# Altium PCB encoder.PcbDoc
Units mil, origin at the board's own origin, x right, y up, seen from the top; angles counter-clockwise.
Board outline 2761.95 x 2761.84 mil, 2 copper layers (Top Layer, Bottom Layer); 87 components, 82 nets, 319 pads, 169 vias.
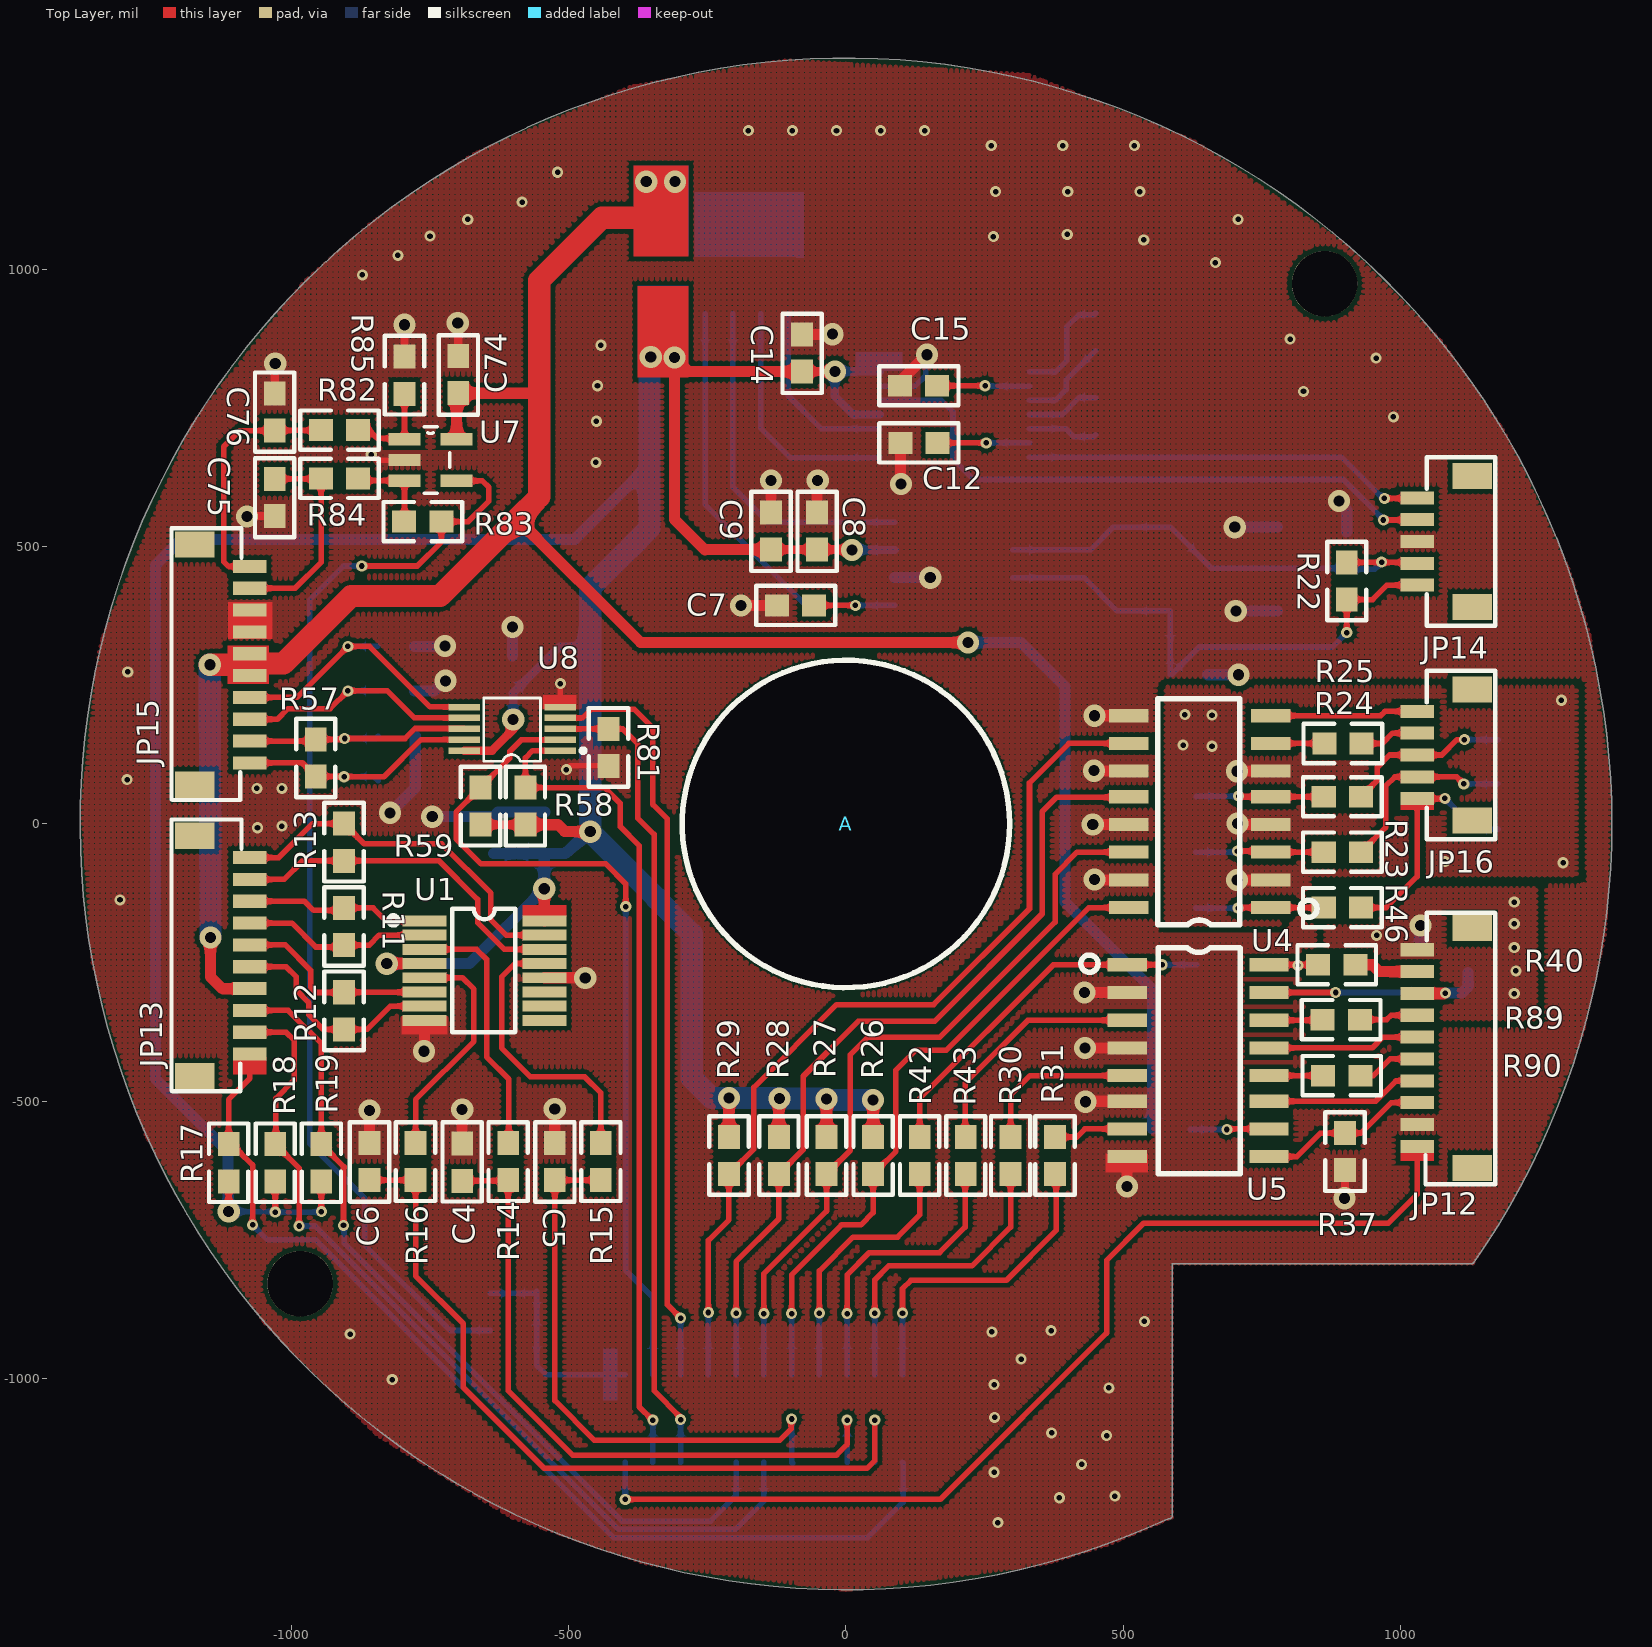
[diagram p0: Top Layer view]
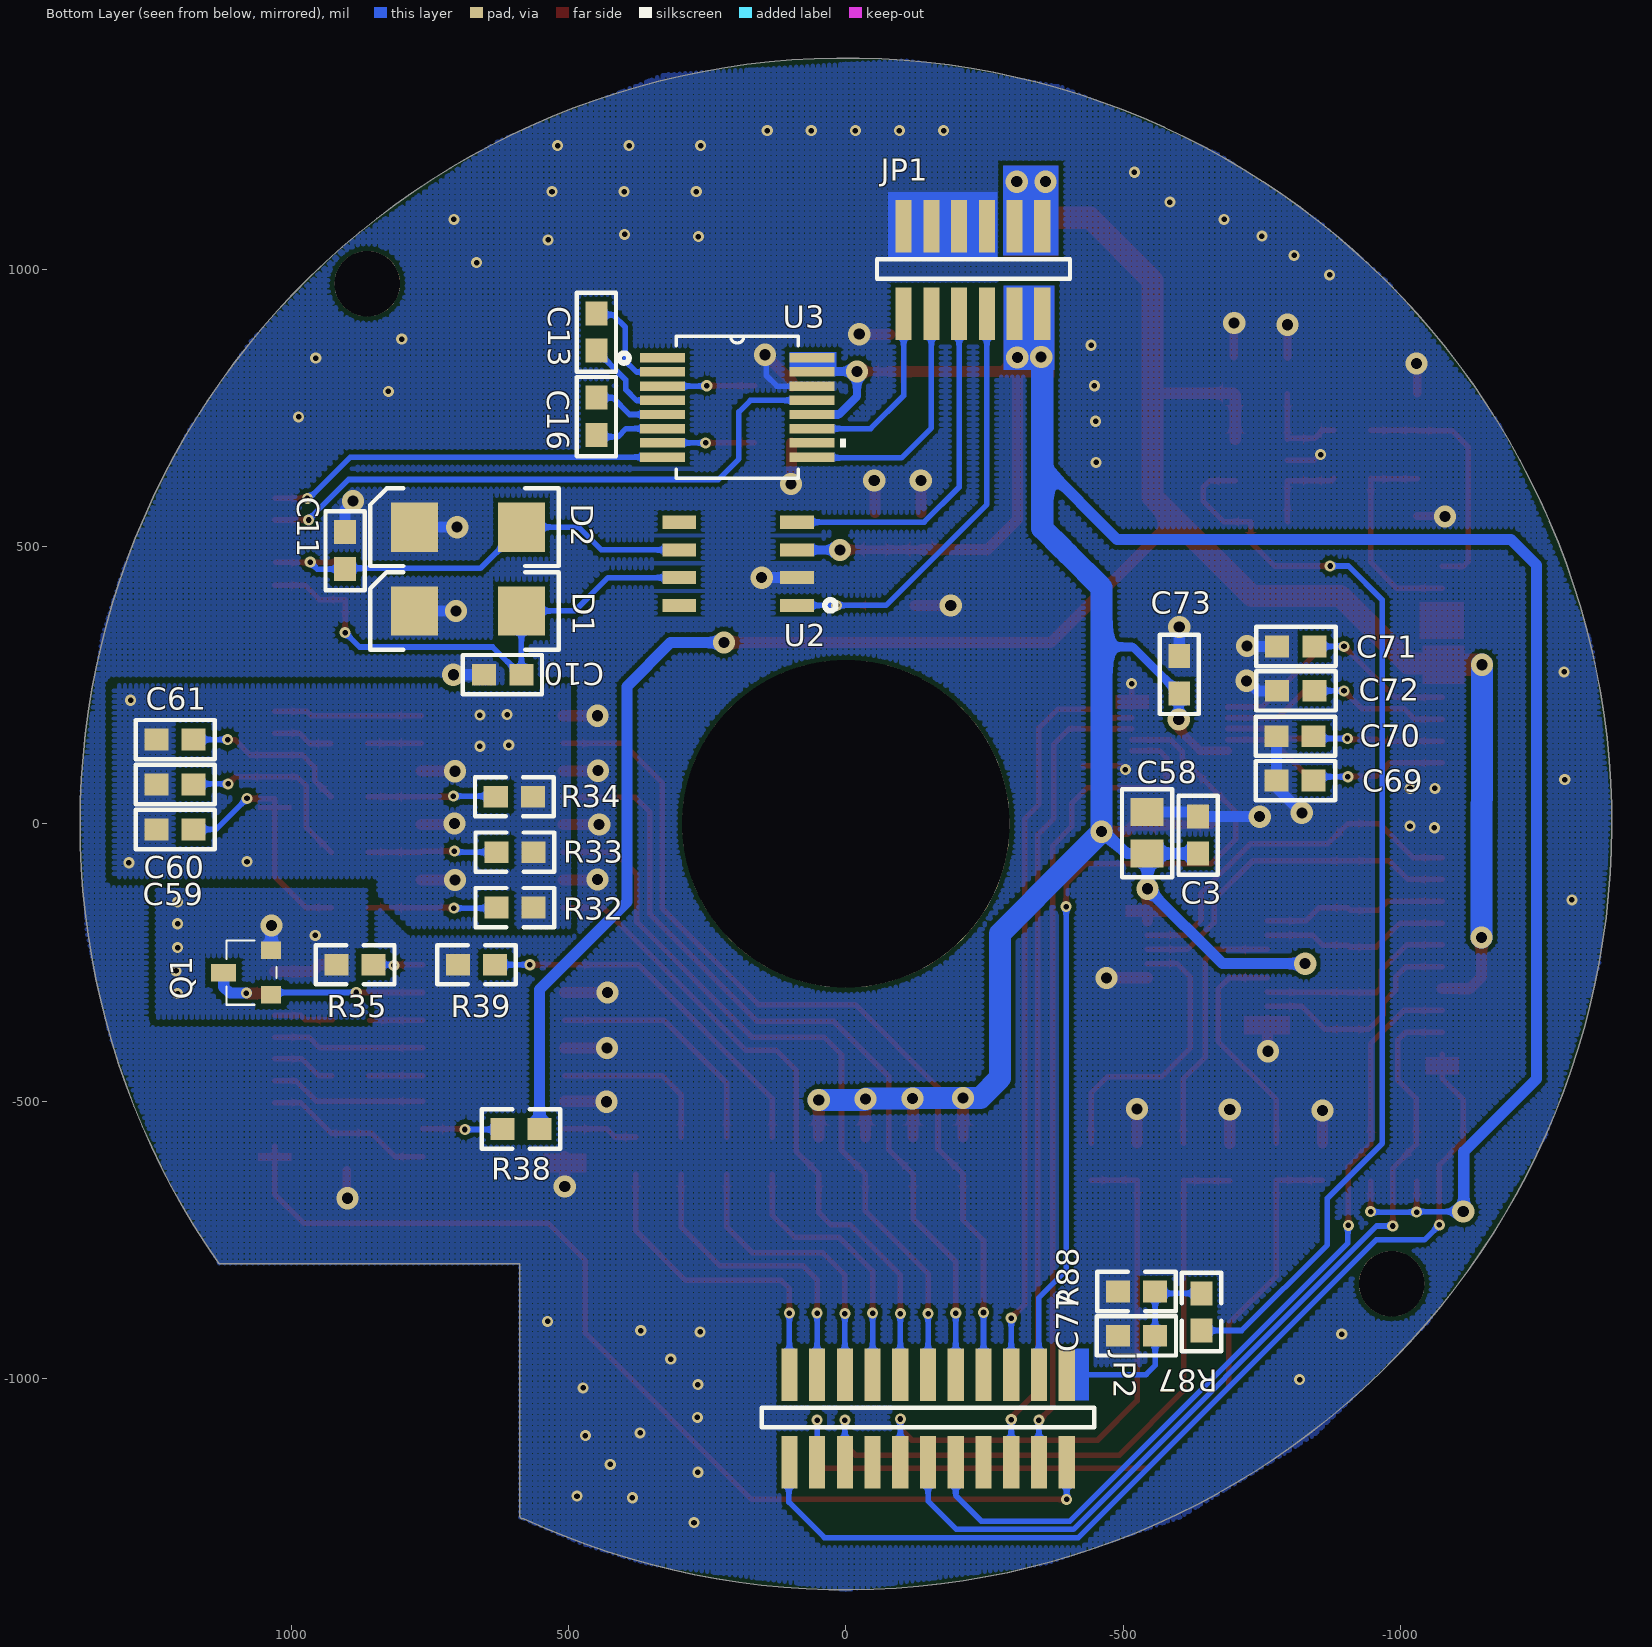
[diagram p1: Bottom Layer view, seen from below]

## Layer stack, top to bottom
Top Solder: solder mask 0.4, Solder Resist, Dk 3.5
Top Layer: signal copper 1.4
Dielectric 1: dielectric 12.6, FR-4, Dk 4.8
Bottom Layer: signal copper 1.4
Bottom Solder: solder mask 0.4, Solder Resist, Dk 3.5

## Board outline
581.26,-1252.7 cw(c0,0) 1380.99,0 cw(c0,0) 1132.1,-790.86 cw(c1127.99,-787.99) 1127.99,-793.01 588.01,-793.01 588.01,-1247.99 cw(c582.99,-1247.99)

## Design rules (kind name [scope] priority, off if disabled: settings)
Clearance Clearance_3 [InNet('GND1')] p1: gap=10
Clearance Clearance_2 [InNet('GND2')] p2: gap=10
Clearance Clearance_1 [InNet('GND')] p3: gap=8
Clearance [All] p4: gap=5
ComponentClearance [All] p1: gap=0 collisioncheckmode=3 verticalgap=0 showdistances=FALSE
HoleSize [All] p1: absolutevalues=TRUE maxlimit=600 minlimit=1 maxpercent=80.000 minpercent=20.000
HoleToHoleClearance [All] p1: gap=0 allowstackedmicrovias=TRUE
MinimumSolderMaskSliver [All] p1: minsoldermaskwidth=0
PolygonConnect [All] p1: connectstyle=Direct reliefconductorwidth=10 reliefentries=4 polygonreliefangle="90 Angle" airgapwidth=10
RoutingVias [All] p1: holewidth=10 width=20 viastyle="Through Hole" minholewidth=10 minwidth=20 maxholewidth=28 maxwidth=50
SilkToSilkClearance [All] p1: silktosilkclearance=0
SilkToSolderMaskClearance [IsPad] p1: minsilkscreentomaskgap=0 clearancetoexposedcopper=TRUE
SolderMaskExpansion [All] p1: expansion=4
UnpouredPolygon [All] p1: allowunpoured=FALSE
Width [All] p1: maxlimit=40 minlimit=8 preferedwidth=10
23 further rules are at their usual default settings.

## Components (designator, comment, footprint, x,y, rotation, side; value= is the part's Value field where it differs from the comment)
A "circle" Circle 0,0 r90 top locked
C3 "0603B103J6R3NT" CC1608-0603 -635,-19.87 r270 bottom
C4 "0603B150J6R3NT" CC1608-0603 -692,-610 r90 top
C5 "0603B150J6R3NT" CC1608-0603 -525,-609 r270 top
C6 "0603B150J6R3NT" CC1608-0603 -859,-609 r270 top
C7 "0603B104J6R3NT" CC1608-0603 -91,394 r0 top
C8 "0603B104J6R3NT" CC1608-0603 -52,528 r270 top
C9 "0603B104J6R3NT" CC1608-0603 -135,528 r270 top
C10 "0603B104J6R3NT" CC1608-0603 618.87,269 r0 bottom
C11 "0603B104J6R3NT" CC1608-0603 903,493 r270 bottom
C12 "0603B104J6R3NT" CC1608-0603 132,687 r180 top
C13 "0603B104J6R3NT" CC1608-0603 450,887 r270 bottom
C14 "0603B104J6R3NT" CC1608-0603 -79,849 r270 top
C15 "0603B104J6R3NT" CC1608-0603 131,790 r0 top
C16 "0603B104J6R3NT" CC1608-0603 450,735 r270 bottom
C58 "0805B106J100NT" CC2012-0805 -543,-16 r270 bottom
C59 "0603B104J6R3NT" CC1608-0603 1210,-10 r180 bottom
C60 "0603B104J6R3NT" CC1608-0603 1210,71 r180 bottom
C61 "0603B104J6R3NT" CC1608-0603 1210,152 r180 bottom
C69 "0603B331J6R3NT" CC1608-0603 -810,78 r180 bottom
C70 "0603B331J6R3NT" CC1608-0603 -810,158 r180 bottom
C71 "0603B331J6R3NT" CC1608-0603 -811,320 r180 bottom
C72 "0603B331J6R3NT" CC1608-0603 -811,240 r180 bottom
C73 "0603B104J6R3NT" CC1608-0603 -601,269 r90 bottom
C74 "0603B331J6R3NT" CC1608-0603 -699,810 r270 top
C75 "0603B331J6R3NT" CC1608-0603 -1030,588.66 r270 top
C76 "0603B331J6R3NT" CC1608-0603 -1030,743 r270 top
C77 "0603B331J6R3NT" CC1608-0603 -524.13,-923 r0 bottom
D1 "Diode Schottky" TVS 778,384 r180 bottom
D2 "Diode Schottky" TVS 778,535 r180 bottom
JP1 "Header 6X2" DC_1.27_12 -354.02,1077.99 r180 bottom locked
JP2 "Header 11X2" DC_1.27_22 -397.99,-992.99 r180 bottom locked
JP12 "Header 10" SH1.0T-10A 1030,-227 r270 top
JP13 "Header 10" SH1.0T-10A -1075,-415 r90 top
JP14 "SH1.0T-5A" SH1.0T-5A 1030,588 r270 top
JP15 "Header 10" SH1.0T-10A -1075,110 r90 top
JP16 "SH1.0T-5A" SH1.0T-5A 1030,203 r270 top
Q1 "NPN" SOT-23 1037,-308 r90 bottom
R11 "RC03K101JT" CR1608-0603 -905,-185 r270 top
R12 "RC03K101JT" CR1608-0603 -905,-337 r90 top
R13 "RC03K101JT" CR1608-0603 -905,-33 r90 top
R14 "RC03K100JT" CR1608-0603 -609,-609 r90 top
R15 "RC03K100JT" CR1608-0603 -442,-609 r90 top
R16 "RC03K100JT" CR1608-0603 -776,-609 r90 top
R17 "RC03K492JT" CR1608-0603 -1113,-611 r90 top
R18 "RC03K492JT" CR1608-0603 -1029,-611 r90 top
R19 "RC03K492JT" CR1608-0603 -946,-611 r90 top
R22 "RC03K121JT" CR1608-0603 903,438 r270 top
R23 "RC03K492JT" CR1608-0603 895,-51 r0 top
R24 "RC03K492JT" CR1608-0603 895,49 r0 top
R25 "RC03K492JT" CR1608-0603 896,145 r0 top
R26 "RC03K492JT" CR1608-0603 49,-598 r90 top
R27 "RC03K492JT" CR1608-0603 -35,-598 r90 top
R28 "RC03K492JT" CR1608-0603 -121,-598 r90 top
R29 "RC03K492JT" CR1608-0603 -211,-598 r90 top
R30 "RC03K492JT" CR1608-0603 297,-598 r270 top
R31 "RC03K492JT" CR1608-0603 377,-598 r270 top
R32 "RC03K501JT" CR1608-0603 597,-151 r180 bottom
R33 "RC03K501JT" CR1608-0603 597,-51 r180 bottom
R34 "RC03K501JT" CR1608-0603 598,49 r180 bottom
R35 "RC03K492JT" CR1608-0603 885,-254 r180 bottom
R37 "RC03K492JT" CR1608-0603 899.87,-591 r90 top
R38 "RC03K492JT" CR1608-0603 586,-550 r0 bottom
R39 "RC03K492JT" CR1608-0603 666,-254 r180 bottom
R40 "RC03K492JT" CR1608-0603 885,-254 r0 top
R42 "RC03K492JT" CR1608-0603 133,-598 r270 top
R43 "RC03K492JT" CR1608-0603 216,-598 r270 top
R46 "RC03K492JT" CR1608-0603 895,-151 r0 top
R57 "RC03K121JT" CR1608-0603 -956,119 r270 top
R58 "RC03K103JT" CR1608-0603 -578,32 r90 top
R59 "RC03K103JT" CR1608-0603 -659,32 r90 top
R81 "RC03K103JT" CR1608-0603 -428,138 r270 top
R82 "RC03K103JT" CR1608-0603 -913,710 r0 top
R83 "RC03K103JT" CR1608-0603 -763,545 r0 top
R84 "RC03K103JT" CR1608-0603 -913,623 r0 top
R85 "RC03K103JT" CR1608-0603 -796,809 r270 top
R87 "RC03K103JT" CR1608-0603 -641,-880 r270 bottom
R88 "RC03K103JT" CR1608-0603 -524,-843 r0 bottom
R89 "RC03K492JT" CR1608-0603 893,-353 r180 top
R90 "RC03K492JT" CR1608-0603 894,-454 r180 top
U1 "DS90LV032A" DS90LV032A -760,-175 r0 top
U2 "TCAN322" TCAN332 88,394 r0 bottom
U3 "MAX3227E_DB_16" MAX3227E 196,751 r180 bottom
U4 "PS2805C-4" PS2805C_4 766,-151 r180 top
U5 "PS2805C-4" PS2805C_4 507,-254 r0 top
U7 "LVM321" LVM321 -749,656 r0 top
U8 "SN65HVD73" SN65HVD73 -515,132 r90 top

## Footprints (in the part's own frame and the unit in brackets; to place one, negate y for a bottom-side part, rotate by r counter-clockwise, add the part's x,y. Pads: shape width x height; smd on the part's side, far side on the other; paste and mask are expansions set on the pad)
CC1608-0603 [mm]
  rect 1.1x1 smd: 1(-0.85,0) 2(0.85,0)
  silkscreen extent -1.8,-0.9 1.83,0.9
CC2012-0805 [mm]
  rect 1.3x1.5 smd: 1(-0.95,0) 2(0.95,0)
  silkscreen extent -2,-1.15 2.03,1.15
Circle [mm]
  round 15 hole 15: 0(0,0)
  silkscreen extent -7.5,-7.5 7.5,7.5
CR1608-0603 [mm]
  rect 1.1x1 smd: 1(-0.85,0) 2(0.85,0)
  silkscreen extent -1.8,-0.9 1.8,0.9
DC_1.27_12 [mm]
  rect 0.74x2.4 smd: 1(0,0) 2(0,-4.013) 3(-1.27,0) 4(-1.27,-4.013) 5(-2.54,0) 6(-2.54,-4.013) 7(-3.81,0) 8(-3.81,-4.013) 9(-5.08,0) 10(-5.08,-4.013) 11(-6.35,0) 12(-6.35,-4.013)
  silkscreen extent -7.57,-2.41 1.27,-1.52
DC_1.27_22 [mm]
  rect 0.74x2.4 smd: 1(0,0) 2(0,-4.013) 3(-1.27,0) 4(-1.27,-4.013) 5(-2.54,0) 6(-2.54,-4.013) 7(-3.81,0) 8(-3.81,-4.013) 9(-5.08,0) 10(-5.08,-4.013) 11(-6.35,0) 12(-6.35,-4.013) 13(-7.62,0) 14(-7.62,-4.013) 15(-8.89,0) 16(-8.89,-4.013) 17(-10.16,0) 18(-10.16,-4.013) 19(-11.43,0) 20(-11.43,-4.013) 21(-12.7,0) 22(-12.7,-4.013)
  silkscreen extent -13.97,-2.41 1.27,-1.52
DS90LV032A [mm]
  rect 2x0.5 smd: 1(0,0) 2(0,-0.65) 3(0,-1.3) 4(0,-1.95) 5(0,-2.6) 6(0,-3.25) 7(0,-3.9) 8(0,-4.55) 9(5.5,-4.55) 10(5.5,-3.9) 11(5.5,-3.25) 12(5.5,-2.6) 13(5.5,-1.95) 14(5.5,-1.3) 15(5.5,-0.65) 16(5.5,0)
  silkscreen extent -1.63,-5.11 4.17,0.56
LVM321 [mil]
  rect 58x22 smd: 1(-47,37.4) 2(-47,0) 3(-47,-37.4) 4(47,-37.4) 5(47,37.4)
  silkscreen extent -12,-60 34,60
MAX3227E [mil]
  rect 81x17 smd: 1(-135,89.57) 2(-135,63.98) 3(-135,38.39) 4(-135,12.8) 5(-135,-12.8) 6(-135,-38.39) 7(-135,-63.98) 8(-135,-89.57) 9(135,-89.57) 10(135,-63.98) 11(135,-38.39) 12(135,-12.8) 13(135,12.8) 14(135,38.39) 15(135,63.98) 16(135,89.57)
  silkscreen extent -213,-128 196,128
PS2805C_4 [mm]
  rect 1.8x0.6 smd: 1(0,0) 2(0,-1.27) 3(0,-2.54) 4(0,-3.81) 5(0,-5.08) 6(0,-6.25) 7(0,-7.52) 8(0,-8.79) 9(6.5,-8.79) 10(6.5,-7.52) 11(6.5,-6.25) 12(6.5,-5.08) 13(6.5,-3.81) 14(6.5,-2.54) 15(6.5,-1.27) 16(6.5,0)
  silkscreen extent -2.12,-9.58 5.18,0.79
SH1.0T-5A [mm]
  rect 1.2x1.8 smd: 0(-1,2.525) 0(5,2.525)
  rect 0.6x1.55 smd: 1(0,0) 2(1,0) 3(2,0) 4(3,0) 5(4,0)
  silkscreen extent -1.85,0.43 5.87,3.58
SH1.0T-10A [mm]
  rect 1.2x1.8 smd: 0(-1,2.525) 0(10,2.525)
  rect 0.6x1.55 smd: 1(0,0) 2(1,0) 3(2,0) 4(3,0) 5(4,0) 6(5,0) 7(6,0) 8(7,0) 9(8,0) 10(9,0)
  silkscreen extent -1.7,0.38 10.74,3.58
SN65HVD73 [mm]
  rect 0.3x1.45 smd: 1(0,0) 2(0.5,0) 3(1,0) 4(1.5,0) 5(2,0) 6(2,4.4) 7(1.5,4.4) 8(1,4.4) 9(0.5,4.4) 10(0,4.4)
  silkscreen extent -0.48,-1.12 2.41,3.51
SOT-23 [mil]
  rect 31.5x36 smd: 1(0,0) 2(80,0)
  rect 31.5x45 smd: 3(40,85)
  silkscreen extent -18,-10 98,80
TCAN332 [mm]
  rect 1.55x0.6 smd: 1(0,0) 2(0,-1.27) 3(0,-2.54) 4(0,-3.81) 5(5.4,-3.81) 6(5.4,-2.54) 7(5.4,-1.27) 8(5.4,0)
  silkscreen extent -1.78,-0.25 -1.27,0.25
TVS [mm]
  rect 2.16x2.26 smd: 1(0,0) 2(4.9,0)
  silkscreen extent -2.03,-1.78 6.6,1.78

## Part data
C3 C4 C5 C6 C7 C8 C9 C10 C11 C12 C13 C14 C15 C16 C58 C59 C60 C61 C69 C70 C71 C72 C73 C74 C75 C76 C77: library part CAP
D1 D2: "Schottky Diode"
JP1: "Header, 6-Pin, Dual row"
JP2: "Header, 10-Pin, Dual row"
JP12 JP13 JP15: "Header, 10-Pin"
Q1: "NPN Bipolar Transistor"
R11 R12 R13 R14 R15 R16 R17 R18 R19 R22 R23 R24 R25 R26 R27 R28 R29 R30 R31 R32 R33 R34 R35 R37 R38 R39 R40 R42 R43 R46 R57 R58 R59 R81 R82 R83 R84 R85 R87 R88 R89 R90: library part Resistor
U3: "Imported"
U4 U5: "Optoisolator"

## Free pads (board coordinates)
  round 118.11 hole 118.11: 9(-984.02,-829.02) 9(862.99,974.02)

## Via types
v1: diameter 20, hole 10, Top Layer to Bottom Layer, 113 vias
v2: diameter 40, hole 20, Top Layer to Bottom Layer, 56 vias

## Nets (pads, with @x,y where several pads share a name; then routed paths per layer and width w, separated by ;. In a path a pad name is that pad's centre, name@x,y a point inside that pad or via, vN(x,y) a via of type N, cw(c..) or ccw(c..) an arc to the next point about the centre after c; other vN are vias at no path point)
3V3: C3.2 C8.2 C9.2 C14.2 C58.2 C73.1 JP1.2 JP1.4 R17.1 R18.1 R19.1 R26.2 R27.2 R28.2 R29.2 R58.1 R59.1 U1.4 U1.16 U2.3 U3.12 U3.15 U3.16 U8.10 | length 7157.9
  Top Layer w10: v2(-1113,-699) R17.1 ; v1(-1029,-700) R18.1 ; v1(-946,-699) R19.1 ; v2(11,494) 22.93,494 v2@23.46,494.54
  Top Layer w15: U8.10 -638,132 -600,170 v2(-600,188) ; R59.1 R58.1 ; C9.2 C8.2 v2@23.46,494.54 ; C14.2 -20.46,815.54 v2(-20,816)
  Top Layer w20: v2(-828,-252) -827.77,-251.77 U1.4 ; R58.1 -519.54,-1.46 -507,-14 v2(-461,-14) ; v2(-544,-117) -544,-174.46 U1.16 ; R29.2 v2(-211,-494) ; C9.2 -253.46,494.54 -254,494 -309,549 v2(-309,841) -283.54,815.54 C14.2 ; R28.2 -121,-496 v2(-120,-495) ; R27.2 v2(-35,-496) ; R26.2 v2(49,-498)
  Bottom Layer w10: v2@-1106.5,-705.5 -1100,-699 -1030,-699 v1(-1029,-700) -947,-700 v1(-946,-699) ; C73.1 C73.1@-600,234.54 ; v2(11,494) 23,494 24,495 v2@25,494
  Bottom Layer w15: C73.1 -517.54,319 -461,319 ; v2(-600,188) C73.1@-600,234.54 ; -400.03,487 -392.03,495 ; v2@25,494 U2.3 ; U3.12 12.8,738.2 -20,771 v2(-20,816) 59.98,816 U3.15
  Bottom Layer w20: v2(-1113,-699) -1114,-698 -1114,-591 -1245,-460 -1245,467 -1199,513 -489.02,513 -354.02,648 ; v2(-828,-252) -679,-252 v2(-544,-117) -544,-54.4 C58.2 ; C3.2 -543.07,-53.33 C58.2 ; v2(-461,-14) -506.4,-53.4 C58.2
  Bottom Layer w40: -400.03,487 -461,426.03 -461,319 v2(-461,-14) -341,-134 -341,-135 -278,-198 -278,-458 -242,-494 v2(-211,-494) -121,-494 v2(-120,-495) -36,-495 v2(-35,-496) -33,-498 v2(49,-498) ; -392.03,495 -354.02,533.02 -354.02,648 JP1.2
  other v2: -352,842
5V0: C74.2 JP1.1 JP1.3 JP13.4 JP15.5 JP15.6 R38.1 U7.5 | length 4225.8
  Top Layer w20: v2(-1146,-205) -1146,-276 -1125.11,-296.89 JP13.4 ; U7.5 -702,773.54 C74.2 -554.46,776.54 -553,778 ; -593,550 -370,327 v2(220,327) ; -555,616 -553,618
  Top Layer w40: v2(-1147,287) -1080.52,287 ; -1073,289 -1014,289 -892,411 -732,411 -593,550 -553,590 -553,618 -553,778 -553,980 -440,1093 -328,1093
  Bottom Layer w20: v2(220,327) 316,327 395,248 395,-141 552.54,-298.54 R38.1
  Bottom Layer w40: v2(-1147,287) v2(-1146,-205)
  other v2: -360,1158 -308,1158
24V: JP12.2 R40.2 | length 116.7
  Top Layer w20: R40.2 949,-254 961.37,-266.37 JP12.2
232_RXD: JP14.1 U3.8 | length 728.8
  Top Layer w10: v1(971,587) JP14.1@1029,587
  Bottom Layer w10: U3.8 893.57,661.43 968,587 v1(971,587)
232_TXD: JP14.2 U3.13 | length 1108.2
  Top Layer w10: v1(969,548) 1029.37,548 JP14.2
  Bottom Layer w10: U3.13 172.2,763.8 193,743 193,658 230,621 896.67,621 v1@969,548.67
/RE: JP2.3 R59.2 U8.2 | length 1542.6
  Top Layer w10: U8.2 -585.32,151.68 -606,131 -606,118.46 R59.2 -703,21.46 -703,-27 -658,-72 -433,-72 -397,-108 v1(-397,-149)
  Bottom Layer w10: v1(-397,-149) -397,-805 -347.99,-854.01 JP2.3
BISSC_CLK: JP2.5 U8.4 | length 1380.4
  Top Layer w10: U8.4 -474.94,191.06 -459,207 -382,207 -348,173 -348,35 -322,9 -322,-867 v1(-298,-891)
  Bottom Layer w10: JP2.5 -297.99,-888.01 v1(-298,-891)
BISSC_DIN: JP2.4 R58.2 U8.1 | length 1517.7
  Top Layer w10: U8.1 -565,132 -578,119 R58.2 -435.46,65.46 -407,37 -407,-5 -373,-39 -373,-1051 -349,-1075 v1(-348,-1075)
  Bottom Layer w10: JP2.4 v1(-348,-1075)
C+: C71.2 JP15.4 U8.6 | length 523.6
  Top Layer w10: JP15.4 -989.89,228.11 v1(-898,320) -859,320 -750,211 -688.49,211 U8.6
  Bottom Layer w10: v1(-898,320) C71.2
C-: C72.2 JP15.3 U8.7 | length 481.9
  Top Layer w10: JP15.3 -1025.26,188.74 -1006,208 -930,208 v1(-898,240) -827,240 -778,191 -688.28,191 U8.7
  Bottom Layer w10: v1(-898,240) C72.2
CAN_RX: C11.2 D2.2 JP14.4 R22.1 U2.6 | length 844.2
  Top Layer w10: R22.1 JP14.4@1028.43,471.46
  Bottom Layer w10: U2.6 441,494 482,535 D2.2 659.09,461 901.54,461 C11.2 953.54,459.54 v1(966,472)
CAN_TX: C10.1 D1.2 JP14.5 R22.2 U2.7 | length 970.8
  Top Layer w10: v1(903,345) R22.2 949.54,404.54 975.52,430.52 JP14.5
  Bottom Layer w10: U2.7 429,444 489,384 D1.2 585.09,269.32 C10.1 587,269 637,319 877,319 v1(903,345)
CANRX_MCU: JP1.8 U2.4 | length 631.1
  Bottom Layer w10: JP1.8 -204,607 -141,544 U2.4
CANTX_MCU: C7.2 JP1.6 U2.1 | length 835.9
  Top Layer w10: C7.2 v1(17,394)
  Bottom Layer w10: JP1.6 -254.02,576.02 -72,394 v1(17,394) U2.1
CAP1: JP2.12 JP13.2 R18.2 | length 1608.6
  Top Layer w10: JP13.2 -1009.37,-375.63 -995,-390 -995,-462 -1028,-495 -1028,-576.54 R18.2 -986,-620.54 v1(-986,-725)
  Bottom Layer w10: v1(-986,-725) -957,-725 -410,-1272 -199,-1272 -147.99,-1220.99 JP2.12
CAP2: JP2.22 JP13.1 R17.2 | length 1851.8
  Top Layer w10: JP13.1 -1075,-459 -1113,-497 R17.2 -1107.46,-577.54 -1070,-615 -1070,-722 -1071,-723 v1(-1070,-723)
  Bottom Layer w10: v1(-1070,-723) -1043,-750 -956,-750 -419,-1287 39,-1287 103,-1223 103,-1151.98 JP2.22
CAP3: JP2.10 JP13.3 R19.2 | length 1525.6
  Top Layer w10: JP13.3 -1005.74,-336.26 -946,-396 R19.2 -905,-618.54 -905,-620 -906,-621 v1(-906,-724)
  Bottom Layer w10: v1(-906,-724) -905,-724 -905,-755.79 -403.79,-1257 -244,-1257 -197.99,-1210.99 JP2.10
D+: C69.2 JP15.1 R57.2 U8.9 | length 489.4
  Top Layer w10: JP15.1 -980.46,110 R57.2 -908.54,85.54 -908,85 v1(-905,85) -833,85 -766,152 -688.54,152 U8.9
  Bottom Layer w10: v1(-905,85) -850.46,85 C69.2
D-: C70.2 JP15.2 R57.1 U8.8 | length 459.2
  Top Layer w10: JP15.2 -959.09,149.37 R57.1 -904.54,152.46 -904,153 v1(-904,154) -795,154 -777,172 -688.86,172 U8.8
  Bottom Layer w10: v1(-904,154) -847.46,154 C70.2
DACC: JP2.2 JP12.10 | length 1886.2
  Top Layer w10: v1(-398,-1218) 170,-1218 470,-918 470,-787 537,-720 978,-720 1030,-668 JP12.10
  Bottom Layer w10: v1(-398,-1218) JP2.2
DE: JP2.6 R81.1 U8.3 | length 1478.3
  Top Layer w10: U8.3 -428.09,171.37 R81.1 -402.46,171.46 -375,144 -375,10 -346,-19 -346,-1022 -298,-1070 v1(-298,-1074)
  Bottom Layer w10: JP2.6 v1(-298,-1074)
DIGIN1: JP2.7 R29.1 U4.10 | length 1617.9
  Top Layer w10: v1(-248,-881) -248,-751 -211,-714 R29.1 -166,-586.46 -166,-475 -17,-326 158,-326 331,-153 331,74 402.06,145.06 U4.10
  Bottom Layer w10: JP2.7 v1(-248,-881)
DIGIN2: JP2.9 R28.1 U4.12 | length 1491.8
  Top Layer w10: v1(-198,-882) -198,-789 -121,-712 R28.1 -77,-587.46 -77,-455 22,-356 160,-356 354,-162 354,22 380,48 509.09,48 U4.12
  Bottom Layer w10: JP2.9 -197.99,-886.01 v1(-198,-882)
DIGIN3: JP2.11 R27.1 U4.14 | length 1345.3
  Top Layer w10: v1(-148,-883) -148,-811 -35,-698 R27.1 8,-588.46 8,-416 39,-385 169,-385 377,-177 377,-91 417,-51 U4.14
  Bottom Layer w10: JP2.11 v1(-148,-883)
DIGIN4: JP2.13 R26.1 U4.16 | length 1188.8
  Top Layer w10: v1(-98,-883) -98,-813 -8,-723 27,-723 49,-701 R26.1 90,-590.46 90,-444 126,-408 181,-408 438,-151 U4.16
  Bottom Layer w10: JP2.13 v1(-98,-883)
DIGOUT1: JP2.17 R43.2 | length 524.2
  Top Layer w10: v1(2,-883) 2,-813 42,-773 169,-773 215,-727 R43.2@215,-631.46
  Bottom Layer w10: JP2.17 v1(2,-883)
DIGOUT2: JP2.19 R30.2 | length 552.3
  Top Layer w10: v1(52,-882) 52,-822 77,-797 227,-797 297,-727 R30.2
  Bottom Layer w10: JP2.19 52.01,-883.01 51,-882 v1(52,-882)
DIGOUT3: JP2.15 R42.2 | length 483.4
  Top Layer w10: v1(-48,-882) -48,-806 13,-745 93,-745 133,-705 R42.2
  Bottom Layer w10: JP2.15 -47.99,-889.01 v1(-48,-882)
DIGOUT4: JP2.21 R31.2 | length 577
  Top Layer w10: v1(102,-882) 102,-838 117,-823 289,-823 379,-733 R31.2@379,-631.46
  Bottom Layer w10: JP2.21 v1(102,-882)
ENCODER_-A: JP13.8 R11.1 U1.1 | length 333.4
  Top Layer w10: JP13.8 -976.59,-139.41 -960,-156 -909.46,-156 R11.1 -852.46,-151.54 -829,-175 U1.1
ENCODER_-B: JP13.5 R12.1 U1.7 | length 406.1
  Top Layer w10: JP13.5 -1009.48,-257.52 -991,-276 -991,-300 -969,-322 -969,-344 -942.54,-370.46 R12.1 -863.46,-370.46 -821.54,-328.54 U1.7
ENCODER_-Z: JP13.9 R13.1 U1.14 | length 636.2
  Top Layer w10: JP13.9 -1013.04,-100.04 -979.46,-66.46 R13.1 -733.54,-66.46 -664,-136 -664,-178 -615.82,-226.18 U1.14
ENCODER_A: JP13.7 R11.2 U1.2 | length 341.8
  Top Layer w10: JP13.7 -999.22,-178.78 -956,-222 -908.54,-222 R11.2 -859.46,-218.46 -841.59,-200.59 U1.2
ENCODER_B: JP13.6 R12.2 U1.6 | length 369.2
  Top Layer w10: JP13.6 -1010.85,-218.15 -965,-264 -965,-295 -956,-304 -905.46,-304 R12.2 -760.58,-303.54 U1.6
ENCODER_Z: JP13.10 R13.2 U1.15 | length 668.4
  Top Layer w10: JP13.10 -1022.67,-60.67 -961.54,0.46 R13.2 -868.54,-36 -729,-36 -640.21,-124.79 -640.21,-172.97 -612.59,-200.59 U1.15
GND: C3.1 C4.2 C5.1 C6.1 C7.1 C8.1 C9.1 C10.2 C11.1 C12.2 C14.1 C15.1 C58.1 C69.1 C70.1 C71.1 C72.1 C73.2 C74.1 C75.2 C76.1 C77.2 D1.1 D2.1 JP1.5 JP1.7 JP1.9 JP1.11 JP12.9 JP14.3 JP15.7 JP15.8 R37.1 R39.1 R81.2 R85.1 R88.2 U1.8 U1.12 U2.2 U3.14 U4.9 U4.11 U4.13 U4.15 U5.2 U5.4 U5.6 U5.8 U7.2 U8.5 | length 2689.5
  Top Layer w10: v1@-854,666 -844,656 U7.2 ; U8.5 v1(-515,253) ; v1(-504,98) -497.46,104.54 R81.2
  Top Layer w15: v2(-1080,554) -1078.81,555.19 C75.2 ; C76.1 -1030,829 v2(-1029,830) ; v1(-856,666) v1@-854,666 ; R85.1 v2(-796,900) ; v2(-700,903) -699,902 C74.1 ; v2(899,-675) 899.87,-674.13 R37.1
  Top Layer w20: C6.1 v2(-859,-517) ; v2(-761,-410) -760,-409 U1.8 ; C4.2 v2(-692,-515) ; U1.12 -470.64,-277.36 v2(-470,-278) ; C5.1 v2(-525,-514) ; v2(-189,394) C7.1 ; C9.1 v2(-135,619) ; C14.1 -25.54,882.46 -24,884 v2(-24,883) ; C8.1 -52,618 v2(-51,619) ; C15.1 97.54,797.54 v2(146,846) ; C12.2 98.54,628.46 99,628 v2(99,613) ; v2(430,-304) 431,-305 433,-305 434,-304 U5.2 ; v2(431,-404) U5.4 ; v2(432,-501) 435,-501 435.94,-500.06 U5.6 ; v2(445,-1) U4.13 ; v2(447,96) 448,95 449,95 449.06,95.06 U4.11 ; v2(448,-100) 449,-101 U4.15 ; v2(448,195) 451,195 451.06,195.06 U4.9 ; v2(507,-654) U5.8
  Bottom Layer w10: U3.14 124.39,789.39 144,809 v2@144,844
  Bottom Layer w20: v2(-822,20) -776.54,65.46 C69.1 C70.1 ; C72.1 -743,240 -725,258 v2(-722,258) ; C71.1 -724,320 v2(-723,321) ; v2(-746,13) -745.4,13.6 C3.1 -627.2,21.4 C58.1 ; C73.2 v2(-601,355) ; U2.2 v2(152,444) ; v2@144,844 v2(146,846) ; C10.2 v2(708,269) ; v2(701,535) 702,534 703,534 704,535 D2.1 ; v2(703,384) D1.1 ; v2(889,582) 889,580 903,566 C11.1
  other v1: 274,-1260 385,-1215 485,-1212 267,-1169 425,-1155 470,-1102.94 371,-1098 268,-1070 474,-1017 267,-1011 -818,-1002 316,-965 -894,-920 263,-916 370,-913.78 538,-897 -1309,-137 -1061,-7 -1017,-4 -1062,64 -1017,64 -1296,80 -1295,274 -451,652 -450,726 987,734 825,780 -448,790 956,840 -442,863 801,874 -872,990 666,1012 -808,1025 537,1053 266,1059 -750,1060 399,1063 -682,1090 707,1090 -584,1121 270,1140 400,1140 530,1140 -520,1175 262,1223 391,1223 520,1223 -176,1250 -96.5,1250 -17,1250 62.5,1250 142,1250
GND1: C59.1 C60.1 C61.1 R32.2 R33.2 R34.2 U4.2 U4.4 U4.6 | length 184.9
  Top Layer w20: v2(705,-101) U4.2 ; v2(705,95) 705.06,95.06 U4.6 ; v2(706,1) 705,1 707,-1 U4.4
  other v1: 1293,-70 1080,-68 660,140 608,142 660,196 611,197 1290,223
GND2: JP12.1 Q1.2 R35.1 | length 45.4
  Bottom Layer w20: v2(1036,-183) 1036,-227 Q1.2
  other v1: 1205,-306 1208,-265 1205,-223 957,-201 1205,-180 1205,-141
INPUT1: JP16.2 R25.2 | length 108.3
  Top Layer w10: R25.2 967,145 985.63,163.63 JP16.2
INPUT2: C61.2 JP16.3 R24.2 | length 304.5
  Top Layer w10: R24.2 958,78.54 958,102 980.26,124.26 JP16.3 1074.26,124.26 1102,152 v1(1115,152)
  Bottom Layer w10: v1(1115,152) C61.2
INPUT3: C60.2 JP16.4 R23.2 | length 352.3
  Top Layer w10: R23.2 973,-6.46 973,68 989.89,84.89 JP16.4 1101.11,84.89 v1(1114,72)
  Bottom Layer w10: v1(1114,72) C60.2@1175.54,72
INPUT4: C59.2 JP16.5 R46.2 | length 435.2
  Top Layer w10: R46.2 974,-151 1030,-95 JP16.5 1079.52,45.52 v1(1080,46)
  Bottom Layer w10: v1(1080,46) 1136,-10 C59.2
INRET1: JP16.1 U4.8 | length 267.3
  Top Layer w10: U4.8 964.06,195.06 972,203 JP16.1
NetC12_1: C12.1 U3.7 | length 165.5
  Top Layer w10: C12.1 v1(253,687)
  Bottom Layer w10: v1(253,687) U3.7
NetC13_1: C13.1 U3.2 | length 198.4
  Bottom Layer w10: U3.2 377.98,814.98 398,835 398,896 420,918 447.54,918 C13.1
NetC13_2: C13.2 U3.4 | length 166.4
  Bottom Layer w10: U3.4 377.8,763.8 397,783 397,800.54 C13.2
NetC15_2: C15.2 U3.3 | length 166.8
  Top Layer w10: C15.2 v1(251,790)
  Bottom Layer w10: v1(251,790) 251.61,789.39 U3.3
NetC16_1: C16.1 U3.5 | length 131.5
  Bottom Layer w10: U3.5 390.2,738.2 420.46,768.46 C16.1
NetC16_2: C16.2 U3.6 | length 126.5
  Bottom Layer w10: U3.6 396.39,712.61 411,698 446.46,698 C16.2
NetQ1_1: Q1.1 U5.15 | length 270.1
  Top Layer w10: U5.15 v1(883,-304)
  Bottom Layer w10: v1(883,-304) Q1.1@1033,-304
NetR14_2: R14.2 U1.3 | length 467.9
  Top Layer w10: U1.3 -665.82,-226.18 -648,-244 -648,-420 -608,-460 -608,-574.54 R14.2
NetR15_2: R15.2 U1.13 | length 518.7
  Top Layer w10: U1.13 -596.77,-251.77 -621,-276 -621,-404 -569,-456 -471,-456 -442,-485 R15.2
NetR16_2: R16.2 U1.5 | length 418.6
  Top Layer w10: R16.2 -776,-497 -671,-392 -671,-298 -691.64,-277.36 U1.5
NetR23_1: R23.1 R33.1 U4.3 | length 232.7
  Top Layer w10: v1(706,-49) 764,-49 U4.3 R23.1
  Bottom Layer w10: R33.1 702,-51 704,-49 v1(706,-49)
NetR24_1: R24.1 R34.1 U4.5 | length 230.9
  Top Layer w10: v1(708,50) 709,49 U4.5 R24.1
  Bottom Layer w10: R34.1 632.46,50 v1(708,50)
NetR25_1: R25.1 U4.7 | length 96.5
  Top Layer w10: U4.7 R25.1@862.47,145.06
NetR30_1: R30.1 U5.5 | length 300
  Top Layer w10: R30.1 297,-489 332,-454 U5.5
NetR31_1: R31.1 U5.7 | length 134
  Top Layer w10: R31.1@379,-564.54 416.46,-564.54 430.94,-550.06 U5.7
NetR32_1: R32.1 R46.1 U4.1 | length 231.9
  Top Layer w10: v1(707,-152) 708,-151 U4.1 R46.1
  Bottom Layer w10: R32.1 631.46,-152 v1(707,-152)
NetR35_2: R35.2 R40.1 U5.16 | length 125.6
  Top Layer w10: U5.16 R40.1
  Bottom Layer w10: v1(815,-255) 816,-254 R35.2
NetR38_2: R38.2 U5.10 | length 142.8
  Top Layer w10: v1(687,-551) 687.94,-550.06 U5.10
  Bottom Layer w10: R38.2@620.46,-551 v1(687,-551)
NetR39_2: R39.2 R42.1 U5.1 | length 668.9
  Top Layer w10: R42.1 133,-495 374,-254 U5.1 v1(570,-254)
  Bottom Layer w10: v1(570,-254) R39.2
NetR43_1: R43.1 U5.3 | length 436.3
  Top Layer w10: R43.1@215,-564.54 215,-467 328,-354 U5.3
NetR82_2: R82.2 R85.2 U7.1 | length 172.5
  Top Layer w10: R82.2 -860,710 -845,695 -797.6,695 U7.1 R85.2
NetR83_1: R83.1 R84.2 U7.3 | length 159.1
  Top Layer w10: R84.2 -875.54,619 -796.4,619 U7.3 -796,545.46 R83.1
NetR89_2: R89.2 U5.14 | length 95.6
  Top Layer w10: U5.14 R89.2@858.54,-354
NetR90_2: R90.2 U5.12 | length 97.6
  Top Layer w10: U5.12 R90.2
OUTPUT1: JP12.4 R89.1 | length 106.8
  Top Layer w10: R89.1 975,-353 982.89,-345.11 JP12.4
OUTPUT2: JP12.6 R90.1 | length 115
  Top Layer w10: R90.1 951,-454 981.15,-423.85 JP12.6
OUTPUT3: JP12.3 Q1.3 | length 122.9
  Top Layer w10: v1@1080.26,-305.74 v1(1081,-305)
  Top Layer w20: JP12.3 v1@1080.26,-305.74
  Bottom Layer w20: v1(1081,-305) 1111,-305 1122,-294 Q1.3
OUTPUT4: JP12.8 R37.2 U5.9 | length 307.5
  Top Layer w10: U5.9 812.94,-600.06 855.46,-557.54 R37.2 928.46,-557.54 983.41,-502.59 JP12.8
OUTRET1: JP12.5 U5.13 | length 275.2
  Top Layer w10: U5.13 949,-404 968.52,-384.48 JP12.5
OUTRET2: JP12.7 U5.11 | length 282.4
  Top Layer w10: U5.11 954.94,-500.06 991.78,-463.22 JP12.7
QEP1A: C4.1 JP2.18 R14.1 | length 1249.9
  Top Layer w10: C4.1 -610,-643.46 R14.1 -609,-1022 -493,-1138 -17,-1138 2,-1119 v1(2,-1075)
  Bottom Layer w10: JP2.18 v1(2,-1075)
QEP1B: C6.2 JP2.20 R16.1 | length 1449.4
  Top Layer w10: C6.2 R16.1 -776,-815 -690,-901 -690,-1016 -544,-1162 38,-1162 52,-1148 v1(52,-1075)
  Bottom Layer w10: JP2.20 v1(52,-1075)
QEP1I: C5.2 JP2.14 R15.1 | length 1043.5
  Top Layer w10: R15.1 C5.2 -525,-1040 -454,-1111 -119,-1111 -99,-1091 -99,-1074 v1(-98,-1073)
  Bottom Layer w10: v1(-98,-1073) JP2.14 JP2.14@-96,-1152.98
SCI_RXD: JP1.10 U3.9 | length 444
  Bottom Layer w10: JP1.10 -154.02,714.02 -100,660 59.57,660 U3.9
SCI_TXD: JP1.12 U3.11 | length 337.6
  Bottom Layer w10: JP1.12 -104,772 -44.61,712.61 U3.11
SIG1: C76.2 JP15.10 R82.1 | length 445.6
  Top Layer w10: JP15.10 -1113.33,464.33 -1122,473 -1122,680 -1093,709 -1030.54,709 C76.2 -946.93,709.54 R82.1
SIG2: C75.1 JP15.9 R84.1 | length 383.2
  Top Layer w10: JP15.9 -993.04,424.96 -946.46,471.54 R84.1 -947.34,622.12 C75.1
T: C77.1 JP2.1 R87.1 R88.1 | length 384.9
  Bottom Layer w10: R87.1 -561,-846.54 R88.1 -557.46,-922.87 C77.1 -557.6,-976.4 -541.01,-992.99 JP2.1
TQ: R83.2 R87.2 U7.4 | length 2000.9
  Top Layer w10: v1(-873,465) -773,465 -729.54,508.46 R83.2 -681,545 -644,582 -644,607 -655.6,618.6 U7.4
  Bottom Layer w10: v1(-873,465) -906,465 -967,404 -967,-576 -868,-675 -868,-759 -713.54,-913.46 R87.2
pads on no net: A.0 JP2.8 JP2.16 JP12.0 JP13.0 JP14.0 JP15.0 JP16.0 U1.9 U1.10 U1.11 U2.5 U2.8 U3.1 U3.10

## Polygon pours and split planes (outlines as drawn)
GND on Bottom Layer "Mechanical 1-No Net" (hatched 90Degree grid 10 track 8, remove dead copper, pour order 12): -976.84,976.84 -1177.49,721.56 -1339,338 -1346,313 -1377,28 -1357.86,-251.66 -1262.03,-561.89 -1050.11,-896.88 -846.04,-1100.95 -603,-1249.91 -357.55,-1334.39 -0.22,-1381.24 357.55,-1334.39 475,-1298 587.63,-1249.91 587.63,-793.39 588.01,-793.01 588.6,-792.42 1129.91,-792.42 1216,-648 1326,-384 1369,-195 1378,59 1341,338 1301.78,460.98 1186,708 1073.6,869.38 894.87,1048.1 627.17,1230.89 328,1351 -108.35,1376.73 -387.17,1329.17 -672,1207 -856,1083
GND1 on Bottom Layer "Mechanical 1-No Net" (hatched 90Degree grid 10 track 8, remove dead copper, pour order 10): 500,250 1320,250 1320,-96 1321,-97 1320,-96 843,-96 843,-127 784,-186 499,-186
GND2 on Bottom Layer "Mechanical 1-No Net" (hatched 90Degree grid 10 track 8, remove dead copper, pour order 7): 1243,-350 1243,-119 866,-119 865,-118 865,-350
GND on Top Layer "Mechanical 1-No Net" (hatched 90Degree grid 10 track 8, remove dead copper, pour order 11): -976.84,976.84 -1177.49,721.56 -1339,338 -1346,313 -1377,28 -1357.86,-251.66 -1262.03,-561.89 -1050.11,-896.88 -846.04,-1100.95 -603,-1249.91 -357.55,-1334.39 -0.22,-1381.24 357.55,-1334.39 475,-1298 587.63,-1249.91 587.63,-793.39 588.01,-793.01 588.6,-792.42 1129.91,-792.42 1216,-648 1326,-384 1369,-195 1378,59 1341,338 1301.78,460.98 1186,708 1073.6,869.38 894.87,1048.1 627.17,1230.89 328,1351 -108.35,1376.73 -387.17,1329.17 -672,1207 -856,1083
GND1 on Top Layer "Mechanical 1-No Net" (hatched 90Degree grid 10 track 8, remove dead copper, pour order 9): 577,247 970,247 1135,247 1318,247 1318,220 1318,204 1318,-90 1321,-93 836,-93 836,-126 783,-179 780,-182 577,-182 577,27
GND2 on Top Layer "Mechanical 1-No Net" (hatched 90Degree grid 10 track 8, remove dead copper, pour order 8): 1246,-352 1245,-351 1245,-116 861,-116 864,-119 864,-353

## Other copper
Top Layer:
  rectangle net INPUT4: 1000,25 1060,34
  rectangle net GND: 468,-629 545,-594
  rectangle net GND: -801,-380 -718,-346
  rectangle net 3V3: -376,805 -284,970
  rectangle net 5V0: -383,1023 -284,1187
  rectangle net 5V0: -1115,252 -1040,322
  rectangle net GND: -1114,333 -1034,400
  rectangle net 3V3: -583,-168 -504,-146
  rectangle net CAP2: -1105,-452 -1045,-420
  rectangle net GND: -546,207 -486,232
  rectangle net DACC: 1000,-608 1060,-593
Bottom Layer:
  rectangle net GND: -90,1020 -75.45,1139.24
  rectangle net GND: -273,1134 -75.45,1139.24
  rectangle net T: -438,-1040 -412,-946
  rectangle net GND: -273,1022 -82,1134
  rectangle net 3V3: -376,818 -284,971
  rectangle net 5V0: -383,1025 -283,1187
  rectangle net 3V3: 17,817 102,851

## Silkscreen, mask and mechanical layers (free items; w line width, h text height)
Mechanical 1:
  lines w10: 582.37,-1246.65 cw(c0,0) 1127.99,-787.99 582.99,-787.99 582.99,-1247.99